# Altium PCB LED_Dimmer_MOSFET_SSR_v1.1.PcbDoc
Units mm, origin at the board's own origin, x right, y up, seen from the top; angles counter-clockwise.
Board outline 139.61 x 63.66 mm, 2 copper layers (Top Layer, Bottom Layer); 57 components, 61 nets, 371 pads, 48 vias.
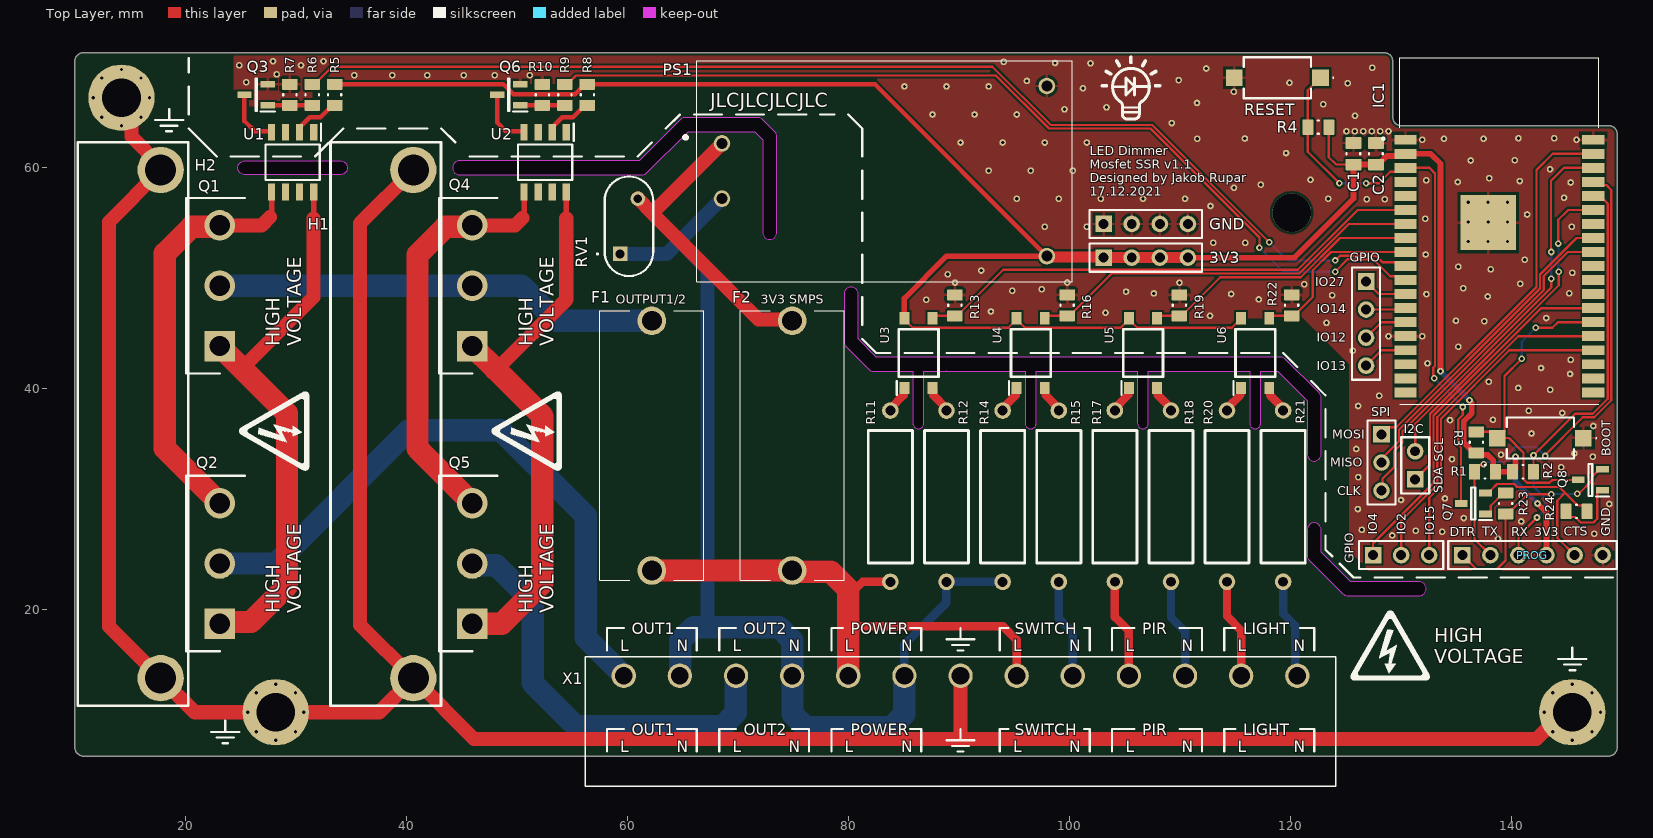
[diagram p0: Top Layer view]
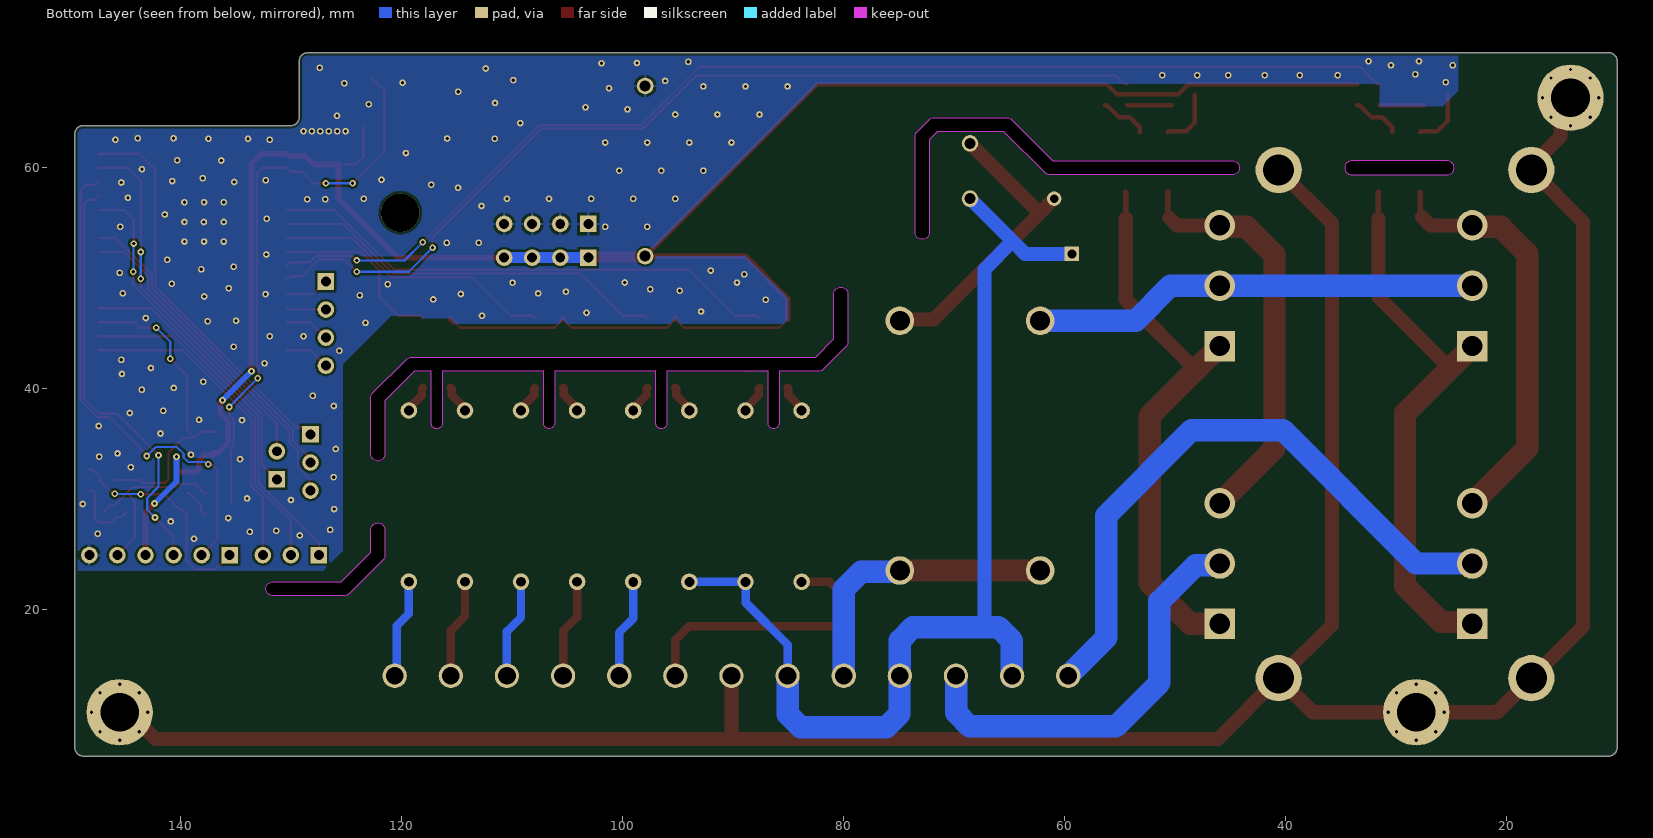
[diagram p1: Bottom Layer view, seen from below]
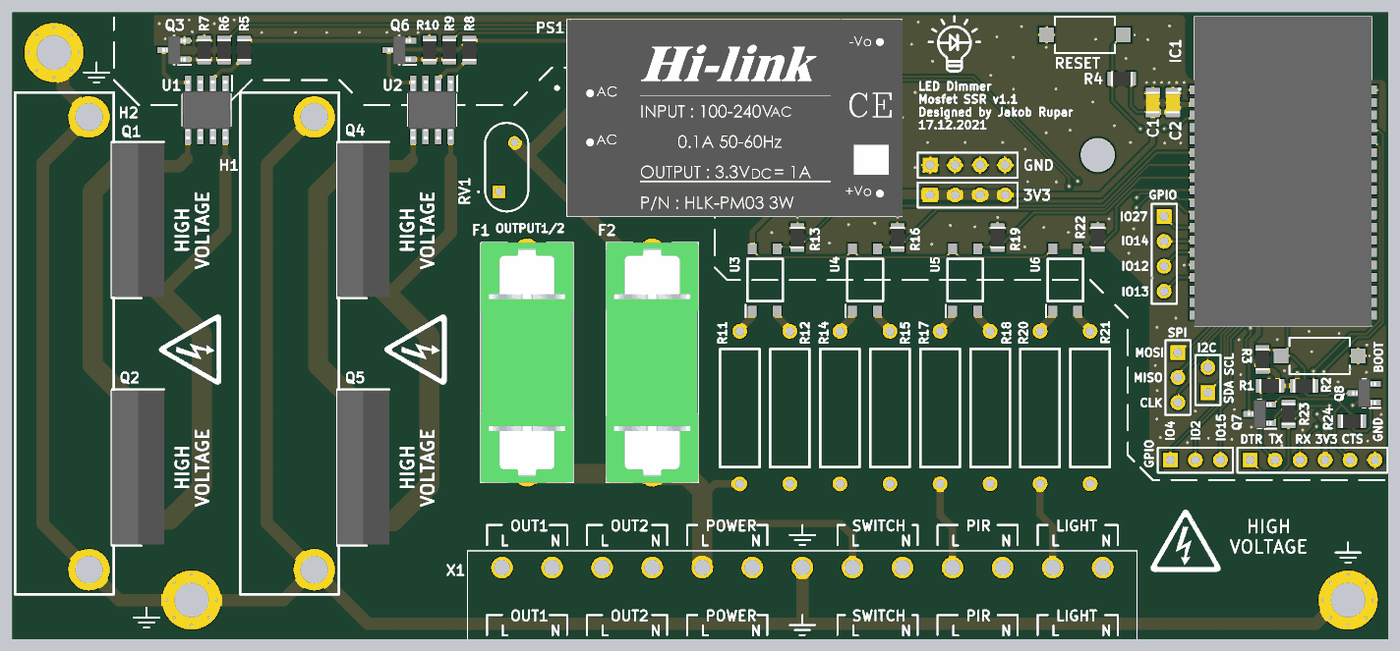
[diagram p2: 3D render of the assembled board from above, using the file's embedded part models]

## Layer stack, top to bottom
Top Solder: solder mask 0.0102, Solder Resist, Dk 3.5
Top Layer: signal copper 0.0356
Dielectric 1: dielectric 0.32, FR-4, Dk 4.8
Bottom Layer: signal copper 0.0356
Bottom Solder: solder mask 0.0102, Solder Resist, Dk 3.5

## Board outline
10,7.493 ccw(c10.811,7.51) 10.828,6.698 148.811,6.698 ccw(c148.811,7.493) 149.606,7.493 149.606,62.992 ccw(c148.844,62.992) 148.844,63.754 130.048,63.754 cw(c130.048,64.516) 129.286,64.516 129.286,69.596 ccw(c128.524,69.596) 128.524,70.358 10.795,70.358 ccw(c10.778,69.579) 10,69.596
cut-out: 44.831,59.309 61.341,59.309 ccw(c61.341,59.944) 61.79,59.495 65.513,63.218 71.555,63.218 72.266,62.506 72.266,54.098 ccw(c72.902,54.098) 73.537,54.098 73.537,62.769 ccw(c72.902,62.769) 73.351,63.219 72.267,64.302 ccw(c71.818,63.853) 71.818,64.488 65.25,64.488 ccw(c65.25,63.853) 64.801,64.302 61.078,60.579 44.831,60.579 ccw(c44.831,59.944)
cut-out: 82.296,41.529 85.86,41.529 85.86,36.83 ccw(c86.36,36.83) 86.86,36.83 86.86,41.529 88.9,41.529 cw(c88.899,41.935) 88.898,41.529 88.9,41.529 96.02,41.529 96.02,36.83 ccw(c96.52,36.83) 97.02,36.83 97.02,41.529 106.18,41.529 106.18,36.83 ccw(c106.68,36.83) 107.18,36.83 107.18,41.529 116.34,41.529 116.34,36.83 ccw(c116.84,36.83) 117.34,36.83 117.34,41.529 118.863,41.529 121.539,38.853 121.539,34.036 ccw(c122.174,34.036) 122.809,34.036 122.809,39.116 ccw(c122.174,39.116) 122.623,39.565 119.575,42.613 ccw(c119.126,42.164) 119.126,42.799 88.902,42.799 ccw(c88.9,42.163) 88.9,42.799 82.559,42.799 80.899,44.459 80.899,48.514 ccw(c80.264,48.514) 79.629,48.514 79.629,44.196 ccw(c80.264,44.196) 79.815,43.747 81.847,41.715 ccw(c82.296,42.164)
cut-out: 121.539,24.892 ccw(c122.174,24.892) 121.725,24.443 124.773,21.395 ccw(c125.222,21.844) 125.222,21.209 131.674,21.209 ccw(c131.674,21.844) 132.309,21.844 ccw(c131.674,21.844) 131.674,22.479 125.485,22.479 122.809,25.155 122.809,27.178 ccw(c122.174,27.178) 121.539,27.178
cut-out: 25.4,59.309 cw(c25.4,59.944) 25.4,60.579 34.036,60.579 cw(c34.036,59.944) 34.671,59.944 cw(c34.036,59.944) 34.036,59.309

## Design rules (kind name [scope] priority, off if disabled: settings)
BoardOutlineClearance [All] p1: gap=0.254 ignorepadtopadclearanceinfootprint=FALSE
Clearance [All] p1: gap=0.203 ignorepadtopadclearanceinfootprint=FALSE except(0: Arc-Hole Track-Hole SMDPad-Hole THPad-Hole Via-Hole Fill-Hole Poly-Hole Region-Hole Text-Hole; 0.127: Arc-Arc Arc-Track Track-Track; 0.254: Arc-THPad Arc-Via Arc-Text Track-THPad Track-Via Track-Text SMDPad-SMDPad SMDPad-THPad SMDPad-Via SMDPad-Text THPad-THPad THPad-Via THPad-Text Via-Via Via-Text Fill-Text Poly-Text Region-Text Text-Text)
MinimumSolderMaskSliver [All] p1: minsoldermaskwidth=0.203
PolygonConnect [All] p1: connectstyle=Relief reliefconductorwidth=0.254 reliefentries=4 polygonreliefangle="90 Angle" airgapwidth=0.254
RoutingVias [All] p1: holewidth=0.3 width=0.6 viastyle="Through Hole" minholewidth=0.3 minwidth=0.6 maxholewidth=3 maxwidth=5
SolderMaskExpansion [All] p1: expansion=0.102 istentingtop=FALSE
Width [All] p1: maxlimit=5.08 minlimit=0.127 preferedwidth=0.254
29 further rules are at their usual default settings.

## Classes and differential pairs
component class Mosfet_SSR: F1 H1 H2 Q1 Q2 Q3 Q4 Q5 Q6 R5 R6 R7 R8 R9 R10 U1 U2
component class ESP32_main: 3V3 BOOT C1 C2 GND GPIO I2C IC1 PROG Q7 Q8 R1 R2 R3 R4 R23 R24 RESET SPI
component class 230V_Inputs: F2 PS1 R11 R12 R13 R14 R15 R16 R17 R18 R19 R20 R21 R22 RV1 U3 U4 U5 U6 X1

## Components (designator, comment, footprint, x,y, rotation, side; value= is the part's Value field where it differs from the comment)
3V3 "3V3" HDR1X4 103.124,51.816 r0 top (schematic designator P4)
BOOT "1TS002E-2500-2500-CT" 1TS002E25002500CT 142.646,35.484 r180 top (schematic designator S1)
C1 "10 uF" C2012_0805I_N 125.73,61.214 r90 top
C2 "0.1 uF" C2012_0805I_N 127.762,61.214 r90 top
F1 "0PTF0078P" FH1-200CK-B 62.23,34.798 r90 top
F2 "0PTF0078P" FH1-200CK-B 74.93,34.798 r90 top
GND "GND" HDR1X4 103.124,54.864 r0 top (schematic designator P6)
GPIO "GPIO" HDR1X3 127.508,24.892 r0 top (schematic designator P7)
GPIO "GPIO" HDR1X4 126.873,49.657 r270 top (schematic designator P3)
H1 "C247-050-2VE" C247-050-2VE 40.64,13.75 r90 top
H2 "C247-050-2VE" C247-050-2VE 17.78,13.75 r90 top
I2C "I2C" HDR1X2 131.318,31.75 r90 top (schematic designator P5)
IC1 "ESP32-WROVER-IB__16MB_" ESP32WROVERIB16MB 138.938,51.054 r0 top
PROG "PROG" HDR1X6 135.585,24.892 r0 top (schematic designator P1)
PS1 "HLK-PM03" HLKPM03 68.58,62.15 r0 top
Q1 "IRFP460PBF" TO546P531X1558X2511-3P 23.114,43.816 r90 top
Q2 "IRFP460PBF" TO546P531X1558X2511-3P 23.114,18.67 r90 top
Q3 "SI2302CDS-T1-E3" SOT95P237X112-3N 26.416,66.548 r180 top
Q4 "IRFP460PBF" TO546P531X1558X2511-3P 45.974,43.816 r90 top
Q5 "IRFP460PBF" TO546P531X1558X2511-3P 45.974,18.67 r90 top
Q6 "SI2302CDS-T1-E3" SOT95P237X112-3N 49.276,66.548 r180 top
Q7 "S8050" SOT95P240X110-3N 136.576,29.566 r180 top
Q8 "S8050" SOT95P240X110-3N 147.168,31.699 r180 top
R1 "10k" R2012_0805I_N 137.632,32.436 r0 top
R2 "10k" R2012_0805I_N 141.072,32.436 r180 top
R3 "10k" R2012_0805I_N 136.855,35.103 r270 top
R4 "10k" R2012_0805I_N 122.555,63.627 r0 top
R5 "36" R2012_0805I_N 33.528,66.548 r90 top
R6 "100" R2012_0805I_N 31.496,66.548 r90 top
R7 "100k" R2012_0805I_N 29.464,66.548 r270 top
R8 "36" R2012_0805I_N 56.388,66.548 r90 top
R9 "100" R2012_0805I_N 54.356,66.548 r90 top
R10 "100k" R2012_0805I_N 52.324,66.548 r270 top
R11 "47k 2W" MFR02SF4702A10 83.82,22.473 r90 top
R12 "47k 2W" MFR02SF4702A10 88.9,22.473 r90 top
R13 "10k" R2012_0805I_N 89.662,47.498 r270 top
R14 "47k 2W" MFR02SF4702A10 93.98,22.473 r90 top
R15 "47k 2W" MFR02SF4702A10 99.06,22.473 r90 top
R16 "10k" R2012_0805I_N 99.822,47.498 r270 top
R17 "47k 2W" MFR02SF4702A10 104.14,22.479 r90 top
R18 "47k 2W" MFR02SF4702A10 109.22,22.479 r90 top
R19 "10k" R2012_0805I_N 109.982,47.498 r270 top
R20 "47k 2W" MFR02SF4702A10 114.283,22.479 r90 top
R21 "47k 2W" MFR02SF4702A10 119.363,22.479 r90 top
R22 "10k" R2012_0805I_N 120.142,47.498 r270 top
R23 "10k" R2012_0805I_N 139.497,29.566 r90 top
R24 "10k" R2012_0805I_N 145.923,28.854 r180 top
RESET "1TS002E-2500-2500-CT" 1TS002E25002500CT 118.847,68.097 r180 top (schematic designator S2)
RV1 "B72207S0271K101" B72207S0271K101 59.36,52.15 r90 top
SPI "SPI" HDR1X3 128.27,35.814 r270 top (schematic designator P2)
U1 "Si8752AB-IS" SOIC127P600X175-8N 29.718,60.452 r270 top
U2 "Si8752AB-IS" SOIC127P600X175-8N 52.578,60.452 r270 top
U3 "CT354A" CT354A 87.63,43.18 r90 top
U4 "CT354A" CT354A 97.79,43.18 r90 top
U5 "CT354A" CT354A 107.95,43.18 r90 top
U6 "CT354A" CT354A 118.11,43.18 r90 top
X1 "WJ2EDGRC-5.08-13P" WJ2EDGRC-5.08-13P_SLIM 59.69,13.97 r0 top (schematic designator X?)

## Footprints (in the part's own frame and the unit in brackets; to place one, negate y for a bottom-side part, rotate by r counter-clockwise, add the part's x,y. Pads: shape width x height; smd on the part's side, far side on the other; paste and mask are expansions set on the pad)
1TS002E25002500CT [mm]
  rect 1.5x1.5 smd: 1(-3.9,0) 2(3.9,0)
  silkscreen extent -5.1,-1.85 3.05,1.85
B72207S0271K101 [mm]
  rect 1.3x1.3 hole 0.8: 1(0,0)
  round 1.3 hole 0.8: 2(5,-1.6)
  silkscreen extent -2,-3 7,2.1
C247-050-2VE [mm] "Heatsink"
  round 4.2 hole 2.8: 1(0,0) 2(46,0)
  silkscreen extent -2.5,-2.5 48.5,7.5
C2012_0805I_N [mm] "Chip Capacitor, 2-Leads, Body 2.05x1.25mm, IPC Medium Density"
  rrect15% 1.05x1.45 smd: 1(-0.975,0) 2(0.975,0)
  silkscreen extent -0.05,-0.63 0.05,0.63, body extent -1.1,-0.7 1.1,0.7, height 1.4
CT354A [mm]
  rect 1.1x0.9 smd: 1(-3.15,2.54) 2(-3.15,0) 3(3.15,0) 4(3.15,2.54)
  silkscreen extent -3.78,-0.55 2.15,3.22
ESP32WROVERIB16MB [mm]
  rect 2x0.9 smd: 1(-8.5,11.43) 2(-8.5,10.16) 3(-8.5,8.89) 4(-8.5,7.62) 5(-8.5,6.35) 6(-8.5,5.08) 7(-8.5,3.81) 8(-8.5,2.54) 9(-8.5,1.27) 10(-8.5,0) 11(-8.5,-1.27) 12(-8.5,-2.54) 13(-8.5,-3.81) 14(-8.5,-5.08) 15(-8.5,-6.35) 16(-8.5,-7.62) 17(-8.5,-8.89) 18(-8.5,-10.16) 19(-8.5,-11.43) 20(8.5,-11.43) 21(8.5,-10.16) 22(8.5,-8.89) 23(8.5,-7.62) 24(8.5,-6.35) 25(8.5,-5.08) 26(8.5,-3.81) 27(8.5,-2.54) 28(8.5,-1.27) 29(8.5,0) 30(8.5,1.27) 31(8.5,2.54) 32(8.5,3.81) 33(8.5,5.08) 34(8.5,6.35) 35(8.5,7.62) 36(8.5,8.89) 37(8.5,10.16) 38(8.5,11.43)
  rect 5x5 smd: 39(-1,3.93)
  silkscreen extent -10.6,-12.53 9,18.87, body extent -9,-12.53 9,18.87, height 3.5
FH1-200CK-B [mm]
  round 2.6 hole 1.8: 1(-11.3,0) 2(11.3,0)
  silkscreen extent -12.2,-4.7 12.2,4.7, body extent -12.2,-4.7 12.2,4.7, height 11.45
HDR1X2 [mm] "Connector; Header; 2 Position"
  rect 1.5x1.5 hole 0.9: 1(0,0)
  round 1.5 hole 0.9: 2(2.54,0)
  silkscreen extent -1.27,-1.27 3.81,1.27
HDR1X3 [mm] "Connector; Header; 3 Position"
  rect 1.5x1.5 hole 0.9: 1(0,0)
  round 1.5 hole 0.9: 2(2.54,0) 3(5.08,0)
  silkscreen extent -1.27,-1.27 6.35,1.27
HDR1X4 [mm] "Connector; Header; 4 Position"
  rect 1.5x1.5 hole 0.9: 1(0,0)
  round 1.5 hole 0.9: 2(2.54,0) 3(5.08,0) 4(7.62,0)
  silkscreen extent -1.27,-1.27 8.89,1.27
HDR1X6 [mm] "Connector; Header; 6 Position"
  rect 1.5x1.5 hole 0.9: 1(0,0)
  round 1.5 hole 0.9: 2(2.54,0) 3(5.08,0) 4(7.62,0) 5(10.16,0) 6(12.7,0)
  silkscreen extent -1.27,-1.27 13.97,1.27
HLKPM03 [mm]
  round 1.5 hole 1: 1(0,0) 2(0,-5) 3(29.4,5.2) 4(29.4,-10.2)
  silkscreen extent -3.35,-12.5 31.7,7.5, body extent -2.25,-12.49 31.75,7.51, height 15.28
MFR02SF4702A10 [mm]
  round 1.5 hole 0.9: 1(0,0) 2(15.5,0)
  silkscreen extent 1.7,-2 13.7,2
R2012_0805I_N [mm] "Chip Resistor, 2-Leads, Body 2.05x1.25mm, IPC Medium Density"
  rrect15% 1x1.4 smd: 1(-0.95,0) 2(0.95,0)
  silkscreen extent -0.05,-0.6 0.05,0.6, body extent -1.1,-0.7 1.1,0.7, height 0.8
SOIC127P600X175-8N [mm]
  rect 1.525x0.65 smd: 1(-2.712,1.905) 2(-2.712,0.635) 3(-2.712,-0.635) 4(-2.712,-1.905) 5(2.712,-1.905) 6(2.712,-0.635) 7(2.712,0.635) 8(2.712,1.905)
  silkscreen extent -3.47,-2.45 1.6,2.58, body extent -3,-2.45 3,2.45, height 1.75
SOT95P237X112-3N [mm]
  rect 1.3x0.6 smd: 1(-1.05,0.95) 2(-1.05,-0.95) 3(1.05,0)
  silkscreen extent -1.7,-1.46 0.05,1.5, body extent -1.18,-1.46 1.18,1.46, height 1.12
SOT95P240X110-3N [mm]
  rect 1.15x0.6 smd: 1(-1.1,0.95) 2(-1.1,-0.95) 3(1.1,0)
  silkscreen extent -1.68,-1.45 0.18,1.5, body extent -1.2,-1.45 1.2,1.45, height 1.1
TO546P531X1558X2511-3P [mm]
  rect 2.76x2.76 hole 1.84: 1(0,0)
  round 2.76 hole 1.84: 2(5.46,0) 3(10.92,0)
  silkscreen extent -2.47,-2.29 13.39,3.02, body extent -2.33,-2.29 13.25,3.02, height 24.27
WJ2EDGRC-5.08-13P_SLIM [mm]
  round 2.2 hole 1.6: 1(0,0) 2(5.08,0) 3(10.16,0) 4(15.24,0) 5(20.32,0) 6(25.4,0) 7(30.48,0) 8(35.56,0) 9(40.64,0) 10(45.72,0) 11(50.8,0) 12(55.88,0) 13(60.96,0)
  silkscreen extent -3.5,-10 64.44,1.7

## Part data
3V3 GND GPIO: library part "Header 4", "Header, 4-Pin", LatestRevisionDate=17-Jul-2002, LatestRevisionNote="Re-released for DXP Platform.", Publisher="Altium Limited"
BOOT RESET: "Switch", Manufacturer_Name="HON YUAN", Datasheet Link=https://datasheet.lcsc.com/szlcsc/HYP-1TS002E-2500-2500_C329185.pdf, Height=2.7mm, Manufacturer_Part_Number=1TS002E-2500-2500-CT
C1 C2: library part C, "Capacitor"
F1 F2: "Fuse holder", Manufacturer_Name=LITTELFUSE, Mouser Part Number=576-0PTF0078P, Arrow Part Number=0PTF0078P, Arrow Price/Stock=https://www.arrow.com/en/products/0ptf0078p/littelfuse?region=nac, Datasheet Link=https://media.digikey.com/pdf/Data%20Sheets/Littelfuse%20PDFs/PTF075_77_78.pdf, Height=11.5mm, Manufacturer_Part_Number=0PTF0078P, Mouser Price/Stock=https://www.mouser.co.uk/ProductDetail/Littelfuse/0PTF0078P?qs=Co4VkB5J4%2Fsczy6gG8s%2FsA%3D%3D
GPIO SPI: library part "Header 3", "Header, 3-Pin", LatestRevisionDate=17-Jul-2002, LatestRevisionNote="Re-released for DXP Platform.", Publisher="Altium Limited"
H1 H2: "Heatsink"
I2C: library part "Header 2", "Header, 2-Pin", LatestRevisionDate=17-Jul-2002, LatestRevisionNote="Re-released for DXP Platform.", Publisher="Altium Limited"
IC1: "Integrated Circuit", Manufacturer_Name="Espressif Systems", Manufacturer_Part_Number="ESP32-WROVER-IB (16MB)", Mouser Part Number=356-ESP32WROIB(16MB), Datasheet Link="https://componentsearchengine.com/Datasheets/1/ESP32-WROVER-IB (16MB).pdf", Height=3.4mm, Mouser Price/Stock=https://www.mouser.co.uk/ProductDetail/Espressif-Systems/ESP32-WROVER-IB-16MB?qs=w%2Fv1CP2dgqoY4iJbr7cDFQ%3D%3D
PROG: library part "Header 6", "Header, 6-Pin", LatestRevisionDate=17-Jul-2002, LatestRevisionNote="Re-released for DXP Platform.", Publisher="Altium Limited"
PS1: "Power Supply", Manufacturer_Name=Hi-Link, Datasheet Link=https://datasheet.lcsc.com/szlcsc/1906201102_HI-LINK-HLK-PM03_C209904.pdf, Height=15mm, Manufacturer_Part_Number=HLK-PM03
Q1 Q2 Q4 Q5: "MOSFET (N-Channel)", Manufacturer_Name=Vishay, Mouser Part Number=844-IRFP460PBF, Arrow Part Number=IRFP460PBF, Arrow Price/Stock=https://www.arrow.com/en/products/irfp460pbf/vishay?region=nac, Datasheet Link=http://www.vishay.com/docs/91237/91237.pdf, Height=5.31mm, Manufacturer_Part_Number=IRFP460PBF, Mouser Price/Stock=https://www.mouser.co.uk/ProductDetail/Vishay-Semiconductors/IRFP460PBF?qs=%2FRKvNCQzLu1lHqVRTT%2Fu6Q%3D%3D
Q3 Q6: "MOSFET (N-Channel)", Manufacturer_Name=Vishay, Mouser Part Number=781-SI2302CDS-E3, Arrow Part Number=SI2302CDS-T1-E3, Arrow Price/Stock=https://www.arrow.com/en/products/si2302cds-t1-e3/vishay, Datasheet Link=https://labcenter.componentsearchengine.com/Datasheets/2/SI2302CDS-T1-E3.pdf, Height=1.12mm, Manufacturer_Part_Number=SI2302CDS-T1-E3, Mouser Price/Stock=https://www.mouser.co.uk/ProductDetail/Vishay-Semiconductors/SI2302CDS-T1-E3?qs=%252BPu8jn5UVnHNrjAmGCs%2Fuw%3D%3D
Q7 Q8: "Transistor BJT NPN", Manufacturer_Name=Galaxy, Manufacturer_Part_Number=S8050G, Height=1.1mm
R1 R2 R3 R4 R5 R6 R7 R8 R9 R10 R13 R16 R19 R22 R23 R24: library part R, "R"
R11 R12 R14 R15 R17 R18 R20 R21: library part "47k 2W resistor", "MFR02SF4702A10"
RV1: "Varistor", Manufacturer_Name=TDK, Mouser Part Number=871-B72207S271K101, Arrow Part Number=B72207S0271K101, Arrow Price/Stock=https://www.arrow.com/en/products/b72207s0271k101/epcos-tdk, Datasheet Link=https://product.tdk.com/system/files/dam/doc/product/protection/voltage/lead-disk-varistor/data_sheet/70/db/var/siov_leaded_standard.pdf, Height=11mm, Manufacturer_Part_Number=B72207S0271K101, Mouser Price/Stock=https://www.mouser.co.uk/ProductDetail/EPCOS-TDK/B72207S0271K101?qs=dEfas%2FXlABKLl07P%2FsKndA%3D%3D
U1 U2: "Integrated Circuit", Arrow Part Number=SI8752AB-IS, Manufacturer_Name="Silicon Labs", Mouser Part Number=634-SI8752AB-IS, Arrow Price/Stock=https://www.arrow.com/en/products/si8752ab-is/silicon-labs, Datasheet Link=https://datasheet.datasheetarchive.com/originals/distributors/DKDS-19/378558.pdf, Height=1.75mm, Manufacturer_Part_Number=Si8752AB-IS, Mouser Price/Stock=https://www.mouser.co.uk/ProductDetail/Silicon-Labs/SI8752AB-IS?qs=j6MGy4L9yX1nnSxizYyoBA%3D%3D
X1: "13P 5.08 mm female socket connector"

## Free pads (board coordinates)
  round 6 hole 3.5: 3(14.224,66.294) 3(28.194,10.668) 3(145.542,10.668)
  round 3.5 hole 3.5 unplated mask+0.102: 3(120.142,55.88)
  round 0.6 hole 0.3 mask+0.102: 5(147.447,36.576) 6(145.923,62.484) 7(128.905,44.704) 8(131.953,44.704) 9(128.905,63.246) 10(131.953,62.484) 10(136.123,53.268) 10(136.123,55.046) 10(136.123,56.824) 10(137.901,53.268) 10(137.901,56.824) 10(137.917,55.039) 10(139.679,53.268) 10(139.679,55.046) 10(139.679,56.824) 11(128.143,63.246) 12(127.381,63.246) 13(126.619,63.246) 14(125.095,63.246) 14(125.857,63.246) 15(114.91,66.827) 16(121.285,49.403) 17(109.981,49.55) 18(99.825,49.564) 19(89.668,49.557) 20(51.181,68.326) 21(28.272,68.401) 22(25.527,67.691) 23(24.892,69.215) 24(27.94,69.596) 25(30.48,69.215) 26(32.512,69.596) 27(35.306,68.326) 28(38.735,68.326) 29(41.91,68.326) 30(45.212,68.326) 31(48.006,68.326) 33(85.09,67.31) 34(88.9,67.31) 35(92.71,67.31) 36(87.63,64.77) 37(91.44,64.77) 38(95.25,64.77) 39(90.17,62.23) 40(93.98,62.23) 41(97.79,62.23) 42(92.71,59.69) 43(96.52,59.69) 44(100.33,59.69) 45(95.25,57.15) 46(99.06,57.15) 47(102.87,57.15) 48(97.79,54.61) 49(101.6,54.61) 50(106.68,57.15) 51(110.49,57.15) 52(101.6,62.23) 53(94.071,69.534) 54(96.172,67.808) 55(98.727,69.432) 56(101.929,69.398) 57(103.382,65.413) 58(101.248,67.139) 59(99.578,65.231) 60(112.402,68.935) 61(109.911,67.881) 62(109.283,63.992) 63(111.572,65.815) 64(111.592,62.574) 65(115.906,62.594) 66(119.634,61.278) 67(114.914,58.138) 68(117.348,58.42) 69(123.444,57.15) 70(121.842,58.867) 71(127.432,68.995) 72(125.204,67.598) 73(125.873,64.66) 74(122.996,65.694) 75(119.937,67.638) 76(133.922,62.572) 77(137.506,62.572) 78(140.66,62.613) 79(143.896,62.613) 80(140.333,60.627) 81(136.339,60.606) 82(140.783,58.742) 83(138.018,59.009) 84(135.172,58.661) 85(141.447,55.717) 86(141.241,51.628) 87(135.228,50.992) 88(138.148,50.752) 89(140.829,49.446) 90(135.228,43.742) 91(135.004,46.096) 92(137.581,46.061) 93(135.674,49.051) 94(137.891,48.295) 95(132.316,58.809) 96(132.232,55.329) 97(132.26,52.1) 98(132.334,48.514) 99(132.427,42.245) 100(143.526,59.811) 101(145.384,58.613) 102(144.794,57.24) 103(145.489,54.617) 104(145.544,50.436) 105(145.266,48.577) 106(143.174,46.346) 107(145.387,42.563) 108(142.713,41.826) 109(145.336,41.287) 110(140.652,40.022) 111(143.533,39.858) 112(141.846,35.9) 113(144.634,37.75) 114(133.756,27) 114(134.01,30.023) 114(135.712,28.245) 114(138.811,26.365) 114(140.919,27.94) 114(141.589,37.961) 114(144.526,32.842) 114(147.396,33.807) 114(147.523,26.822) 114(148.895,29.515) 115(137.973,40.589) 116(138.354,37.135) 117(139.09,33.985) 118(145.729,34.093) 125(134.468,37.109) 126(134.645,33.579) 129(131.369,27.102) 130(129.235,26.67) 131(126.492,27.178) 132(126.13,29.057) 133(130.039,29.877) 134(125.979,34.499) 135(126.173,31.95) 136(126.152,38.386) 137(128.052,39.314) 138(115.938,53.148) 139(113.036,53.167) 140(112.789,56.487) 141(92.045,50.646) 142(89.006,50.297) 143(87.067,48.008) 144(92.919,46.943) 145(94.858,48.812) 146(97.514,48.952) 147(103.289,46.819) 148(105.152,48.735) 149(107.665,48.577) 150(112.745,46.555) 151(114.66,48.524) 152(117.156,48.032) 153(123.801,48.397) 154(123.292,45.91) 155(125.657,43.395) 156(126.927,57.1) 157(128.562,57.1)

## Via types
v1: diameter 0.6, hole 0.3, Top Layer to Bottom Layer, 24 vias
v2: diameter 0.6, hole 0.3, Top Layer to Bottom Layer, tented both sides, 24 vias

## Nets (pads, with @x,y where several pads share a name; then routed paths per layer and width w, separated by ;. In a path a pad name is that pad's centre, name@x,y a point inside that pad or via, vN(x,y) a via of type N, cw(c..) or ccw(c..) an arc to the next point about the centre after c; other vN are vias at no path point)
+3V3: 3V3.1 3V3.2 3V3.3 3V3.4 C1.1 C2.1 IC1.2 PROG.4 PS1.4 R1.2 R2.2 R3.2 R4.2 R5.2 R8.2 U3.4 U4.4 U5.4 U6.4 | length 219.8
  Top Layer w0.203: U3.4@85.09,46.23 85.845,45.475 94.495,45.475 95.25,46.23 96.005,45.475 104.655,45.475 105.41,46.23 106.165,45.475 114.705,45.475 115.112,45.882 115.222,45.882 115.274,45.934 115.274,46.034 U6.4@115.374,46.034 ; R4.2 123.505,60.899 124.165,60.239 C1.1
  Top Layer w0.406: R5.2 48.801,67.498 49.707,66.592 55.282,66.592 56.188,67.498 R8.2 82.432,67.498 PS1.4
  Top Layer w0.508: U3.4@85.09,46.23 85.09,48.133 88.907,51.95 PS1.4 ; U4.4@95.25,46.23 U4.4 ; U5.4@105.41,46.23 U5.4 ; 3V3.4 120.396,51.816 125.73,57.15 C1.1 C2.1 127.962,60.239 128.741,61.018 130.242,61.018 IC1.2 132.715,61.214 133.604,60.325 v2(133.604,41.529) ; U6.4@115.374,46.034 115.57,46.23 U6.4 ; v2(136.23,38.903) 136.23,38.878 136.437,38.671 136.437,37.707 135.698,36.968 135.698,35.066 135.712,35.052 135.756,35.052 136.706,34.102 136.906,34.102 137.04,33.968 137.888,33.968 138.393,33.464 138.393,32.626 R1.2 140.03,32.436 140.088,32.377 R2.2@140.096,32.385 ; R3.2 R3.2@137.055,34.153 ; R2.2 140.402,32.716 v2(140.402,33.782) ; v2(142.392,29.566) 143.205,28.753 PROG.4
  Top Layer w1.016: PS1.4 98.047,51.883 103.057,51.883 3V3.1 3V3.2 3V3.3 3V3.4
  Bottom Layer w0.508: v2(133.604,41.529) v2(136.23,38.903) ; v2(140.402,33.782) 140.402,31.556 v2(142.392,29.566)
  Bottom Layer w1.016: 3V3.1 3V3.2 3V3.3 3V3.4
CLK: IC1.30 SPI.3 | length 30.9
  Top Layer w0.203: SPI.3 128.348,30.812 128.348,31.789 129.41,32.851 129.41,34.287 130.175,35.052 130.175,36.109 142.951,48.885 142.951,50.155 145.12,52.324 IC1.30
CTS: PROG.5 Q7.2 R24.1 | length 17.2
  Top Layer w0.203: Q7.2 137.951,30.516 138.149,30.714 138.149,30.755 138.714,31.32 140.279,31.32 140.537,31.063 144.352,31.063 144.883,30.532 ; PROG.5 144.168,26.469 144.168,29.817 144.883,30.532 ; R24.1 146.873,28.979 146.475,29.378 146.037,29.378 144.883,30.532
DTR: PROG.1 Q8.2 R23.1 | length 19.6
  Top Layer w0.203: PROG.1 136.84,23.637 138.724,23.637 139.497,24.409 R23.1 139.895,29.014 140.114,29.014 141.503,30.404 v2(143.637,30.404) ; v2(145.999,30.455) 146.075,30.531 146.205,30.531 147.282,31.607 147.282,31.938 147.993,32.649 Q8.2
  Bottom Layer w0.203: v2(143.637,30.404) 143.662,30.429 145.974,30.429 v2(145.999,30.455)
EARTH: H1.1 H1.2 H2.1 H2.2 pad.3@14.224,66.294 pad.3@28.194,10.668 pad.3@145.542,10.668 X1.7 | length 247.2
  Top Layer w1.27: pad.3@14.224,66.294 15.129,65.389 15.129,62.763 17.78,60.112 H2.2 13.081,55.051 13.081,18.449 H2.1 20.862,10.668 28.194,10.668 37.558,10.668 H1.1 ; H1.2 35.814,54.924 35.814,18.576 H1.1 ; X1.7 90.17,8.306 90.221,8.255 ; pad.3@145.542,10.668 144.701,10.668 142.288,8.255 90.221,8.255 ; H1.1 46.135,8.255 90.221,8.255
  other v1: 28.194,8.128 145.542,8.128 26.416,8.89 29.972,8.89 143.764,8.89 147.32,8.89 25.654,10.668 30.734,10.668 143.002,10.668 148.082,10.668 26.416,12.446 29.972,12.446 143.764,12.446 147.32,12.446 28.194,13.208 145.542,13.208 14.224,63.754 12.446,64.516 16.002,64.516 11.684,66.294 16.764,66.294 12.446,68.072 16.002,68.072 14.224,68.834
GND: BOOT.1 C1.2 C2.2 GND.1 GND.2 GND.3 GND.4 IC1.1 IC1.15 IC1.38 IC1.39 pad.5 pad.6 pad.7 pad.8 pad.9 pad.10 pad.11 pad.12 pad.13 pad.14 pad.15 pad.16 pad.17 pad.18 pad.19 pad.20 pad.21 pad.22 pad.23 pad.24 pad.25 pad.26 pad.27 pad.28 pad.29 pad.30 pad.31 pad.33 pad.34 pad.35 pad.36 pad.37 pad.38 pad.39 pad.40 pad.41 pad.42 pad.43 pad.44 pad.45 pad.46 pad.47 pad.48 pad.49 pad.50 pad.51 pad.52 pad.53 pad.54 pad.55 pad.56 pad.57 pad.58 pad.59 pad.60 pad.61 pad.62 pad.63 pad.64 pad.65 pad.66 pad.67 pad.68 pad.69 pad.70 pad.71 pad.72 pad.73 pad.74 pad.75 pad.76 pad.77 pad.78 pad.79 pad.80 pad.81 pad.82 pad.83 pad.84 pad.85 pad.86 pad.87 pad.88 pad.89 pad.90 pad.91 pad.92 pad.93 pad.94 pad.95 pad.96 pad.97 pad.98 pad.99 pad.100 pad.101 pad.102 pad.103 pad.104 pad.105 pad.106 pad.107 pad.108 pad.109 pad.110 pad.111 pad.112 pad.113 pad.114 pad.115 pad.116 pad.117 pad.118 pad.125 pad.126 pad.129 pad.130 pad.131 pad.132 pad.133 pad.134 pad.135 pad.136 pad.137 pad.138 pad.139 pad.140 pad.141 pad.142 pad.143 pad.144 pad.145 pad.146 pad.147 pad.148 pad.149 pad.150 pad.151 pad.152 pad.153 pad.154 pad.155 pad.156 pad.157 PROG.6 PS1.3 Q3.2 Q6.2 R7.1 R10.1 R13.1 R16.1 R19.1 R22.1 RESET.2
IO0: BOOT.2 IC1.25 Q8.3 R3.1 | length 29.5
  Top Layer w0.203: R3.1 138.177,36.053 BOOT.2 ; v2(140.97,42.672) 139.395,41.097 139.395,36.132 BOOT.2 ; v2(142.24,45.466) 143.73,45.466 144.238,45.974 IC1.25 ; Q8.3 143.75,31.699 143.482,31.431 141.439,31.431 141.122,31.748 141.122,34.163 139.802,35.484 BOOT.2
  Bottom Layer w0.203: v2(140.97,42.672) 140.97,44.196 v2(142.24,45.466)
IO2: GPIO.2@130.048,24.892 IC1.24 | length 31
  Top Layer w0.203: GPIO.2@130.048,24.892 130.048,28.01 133.314,31.276 133.314,37.38 140.638,44.704 IC1.24
IO4: GPIO.1@127.508,24.892 IC1.26 | length 33.4
  Top Layer w0.203: GPIO.1@127.508,24.892 127.508,25.937 132.984,31.413 132.984,37.517 142.711,47.244 IC1.26
IO5: IC1.29
IO12: GPIO.3@126.873,44.577 IC1.14 | length 4.1
  Top Layer w0.203: GPIO.3@126.873,44.577 128.27,45.974 IC1.14
IO13: GPIO.4 IC1.16 | length 4.1
  Top Layer w0.203: GPIO.4 128.27,43.434 IC1.16
IO14: GPIO.2@126.873,47.117 IC1.13 | length 3.6
  Top Layer w0.203: GPIO.2@126.873,47.117 130.311,47.117 IC1.13
IO15: GPIO.3@132.588,24.892 IC1.23 | length 29.1
  Top Layer w0.203: GPIO.3@132.588,24.892 132.588,30.083 133.644,31.139 133.644,37.243 139.835,43.434 IC1.23
IO25: IC1.10 R6.2 | length 107.4
  Top Layer w0.203: R6.2 31.696,67.498 33.286,69.088 93.05,69.088 98.308,63.83 107.493,63.83 v2(118.11,53.213) ; v2(124.079,51.562) 124.511,51.994 127.762,51.994 128.353,51.402 130.09,51.402 IC1.10
  Bottom Layer w0.203: v2(118.11,53.213) 119.761,51.562 v2(124.079,51.562)
IO26: IC1.11 R9.2 | length 85.6
  Top Layer w0.203: R9.2 54.556,67.498 55.361,68.303 93.368,68.303 98.171,63.5 107.356,63.5 117.221,53.635 v2(117.221,52.705) ; v2(124.079,50.546) 125.197,51.664 127.533,51.664 129.065,50.132 130.09,50.132 IC1.11
  Bottom Layer w0.203: v2(117.221,52.705) 119.38,50.546 v2(124.079,50.546)
IO27: GPIO.1@126.873,49.657 IC1.12 | length 4
  Top Layer w0.203: GPIO.1@126.873,49.657 128.016,48.514 IC1.12
IO32: IC1.8 R19.2 U5.3 | length 25.5
  Top Layer w0.203: U5.3 108.168,46.548 R19.2 110.182,46.548 113.684,50.05 120.961,50.05 124.505,53.594 IC1.8
IO33: IC1.9 R22.2 U6.3 | length 16.2
  Top Layer w0.203: U6.3 118.328,46.548 R22.2 120.342,46.548 122.047,48.253 122.047,50.669 123.702,52.324 IC1.9
IO34: IC1.6 R13.2 U3.3 | length 46.9
  Top Layer w0.203: U3.3 87.848,46.548 R13.2 89.862,46.548 94.024,50.71 120.687,50.71 126.111,56.134 IC1.6
IO35: IC1.7 R16.2 U4.3 | length 36.2
  Top Layer w0.203: U4.3 98.008,46.548 R16.2 100.022,46.548 103.854,50.38 120.824,50.38 125.308,54.864 IC1.7
IO36: IC1.4
IO39: IC1.5
LIGHT_L: R20.1 X1.12 | length 9.2
  Top Layer w0.762: R20.1 114.283,19.372 115.57,18.085 X1.12
  Bottom Layer w0.762: R20.1 R20.1@114.424,22.338
LIGHT_N: R21.1 X1.13 | length 9
  Bottom Layer w0.762: R21.1 119.363,19.6 120.447,18.517 120.447,14.173 X1.13
MISO: IC1.31 SPI.2 | length 29.1
  Top Layer w0.203: SPI.2 128.27,33.614 129.845,35.189 129.845,36.246 142.621,49.022 142.621,50.292 145.923,53.594 IC1.31
MOSI: IC1.37 SPI.1 | length 35.9
  Top Layer w0.203: SPI.1 128.918,36.462 129.594,36.462 142.291,49.159 142.291,59.741 143.764,61.214 IC1.37
NetF2_2: F2.2 PS1.1 RV1.2 | length 27.5
  Top Layer w1.27: RV1.2 62.293,55.816 ; PS1.1 62.293,55.864 62.293,55.816 ; F2.2 74.81,46.218 71.892,46.218 62.293,55.816
NetQ1_1: Q1.1 Q2.1 U1.8 | length 50.4
  Top Layer w0.508: 31.623,55.372 U1.8
  Top Layer w1.27: 25.147,41.784 31.623,48.26 31.623,55.372
  Top Layer w2.032: Q2.1 23.283,18.839 25.951,18.839 29.21,22.098 29.21,37.72 25.147,41.784 Q1.1
NetQ1_3: Q1.3 Q2.3 U1.5 | length 37.8
  Top Layer w0.508: 27.686,55.499 27.813,55.626 U1.5
  Top Layer w1.27: Q1.3 26.923,54.736 27.686,55.499
  Top Layer w2.032: Q2.3 18.162,34.542 18.162,52.198 20.561,54.597 22.975,54.597 Q1.3
NetQ3_1: Q3.1 R6.1 R7.2 | length 4
  Top Layer w0.406: Q3.1 R7.2 R6.1
NetQ3_3: Q3.3 U1.4 | length 5.2
  Top Layer w0.406: Q3.3 25.366,66.458 25.36,66.451 25.36,64.175 26.289,63.246 27.731,63.246 U1.4
NetQ4_1: Q4.1 Q5.1 U2.8 | length 50.7
  Top Layer w0.508: 54.483,55.372 U2.8
  Top Layer w1.27: 48.07,41.72 48.197,41.72 54.483,48.006 54.483,55.372
  Top Layer w2.032: Q5.1 Q5.1 48.641,18.669 52.324,22.352 52.324,37.466 48.07,41.72 Q4.1
NetQ4_3: Q4.3 Q5.3 U2.5 | length 37.8
  Top Layer w0.508: 50.527,55.419 50.673,55.565 U2.5
  Top Layer w1.27: Q4.3 49.844,54.736 50.527,55.419
  Top Layer w2.032: Q5.3 41.021,34.543 41.021,52.07 43.548,54.597 45.835,54.597 Q4.3
NetQ6_1: Q6.1 R9.1 R10.2 | length 4
  Top Layer w0.406: Q6.1 R10.2 R9.1
NetQ6_3: Q6.3 U2.4 | length 5.3
  Top Layer w0.406: Q6.3 48.226,64.042 49.022,63.246 50.591,63.246 U2.4
NetQ7_1: Q7.1 R23.2 | length 2.9
  Top Layer w0.203: Q7.1 137.951,28.616 138.149,28.814 138.149,29.368 139.297,30.516 R23.2
NetQ8_1: Q8.1 R24.2 | length 6.4
  Top Layer w0.203: R24.2 144.973,28.729 145.371,28.331 145.809,28.331 146.291,27.85 147.455,27.85 147.794,28.188 147.794,30.551 147.993,30.749 Q8.1
NetR5_1: R5.1 U1.2 | length 4.4
  Top Layer w0.406: U1.2 30.353,63.602 31.264,64.512 32.242,64.512 33.328,65.598 R5.1
NetR8_1: R8.1 U2.2 | length 4.4
  Top Layer w0.406: U2.2 53.213,63.602 54.124,64.512 55.102,64.512 56.188,65.598 R8.1
NetR11_2: R11.2 U3.1 | length 2.6
  Top Layer w0.762: R11.2 83.82,38.173 85.021,39.374 85.021,39.961 U3.1
NetR12_2: R12.2 U3.2 | length 2.6
  Top Layer w0.762: U3.2 87.699,39.961 87.699,39.374 88.9,38.173 R12.2
NetR14_2: R14.2 U4.1 | length 2.6
  Top Layer w0.762: R14.2 93.98,38.173 95.181,39.374 95.181,39.961 U4.1
NetR15_2: R15.2 U4.2 | length 2.6
  Top Layer w0.762: U4.2 97.859,39.961 97.859,39.374 99.06,38.173 R15.2
NetR17_2: R17.2 U5.1 | length 2.6
  Top Layer w0.762: R17.2 104.14,38.179 105.341,39.38 105.341,39.961 U5.1
NetR18_2: R18.2 U5.2 | length 2.6
  Top Layer w0.762: U5.2 108.019,39.961 108.019,39.38 109.22,38.179 R18.2
NetR20_2: R20.2 U6.1 | length 2.6
  Top Layer w0.762: R20.2 114.283,38.179 115.501,39.397 115.501,39.961 U6.1
NetR21_2: R21.2 U6.2 | length 2.6
  Top Layer w0.762: U6.2 118.179,39.961 118.179,39.363 119.363,38.179 R21.2
OUT1_L: Q2.2 X1.1 | length 57.2
  Bottom Layer w2.032: Q2.2 28.194,24.13 40.259,36.195 48.514,36.195 56.261,28.448 56.261,17.399 X1.1@59.635,14.025
OUT2_L: Q5.2 X1.3 | length 38.1
  Bottom Layer w2.032: Q5.2 46.113,23.991 48.145,23.991 51.435,20.701 51.435,13.335 55.372,9.398 68.605,9.398 69.818,10.61 69.818,13.938 X1.3
PIR_L: R17.1 X1.10 | length 9.2
  Top Layer w0.762: R17.1 104.14,19.279 105.41,18.009 X1.10
  Bottom Layer w0.762: R17.1 R17.1@104.281,22.338
PIR_N: R18.1 X1.11 | length 9
  Bottom Layer w0.762: R18.1 109.22,19.253 110.49,17.983 X1.11
PWR_L: F1.1 F2.1 R11.1 X1.5 X1.8 | length 63
  Top Layer w0.762: 80.01,18.44 94.031,18.44 95.25,17.221 X1.8 ; 80.01,21.793 80.62,21.793 81.299,22.473 R11.1
  Top Layer w2.032: F1.1 F2.1 75.039,23.389 78.414,23.389 80.01,21.793 80.01,18.44 X1.5
  Bottom Layer w2.032: F2.1 75.039,23.389 78.414,23.389 80.01,21.793 X1.5
PWR_N: PS1.2 R12.1 R14.1 RV1.1 X1.2 X1.4 X1.6 | length 98.1
  Top Layer w0.762: R12.1@88.881,22.454 R12.1
  Bottom Layer w0.762: X1.6 85.09,16.789 88.881,20.58 R12.1@88.881,22.454 ; R12.1 R14.1
  Bottom Layer w1.27: RV1.1 63.58,52.15 64.732,53.302 ; 67.285,18.364 67.285,50.749 64.732,53.302 ; PS1.2 64.732,53.302
  Bottom Layer w2.032: X1.2@64.802,13.892 64.802,17.152 66.015,18.364 73.74,18.364 74.93,17.174 X1.4 74.962,13.938 74.962,10.512 76.152,9.322 83.9,9.322 85.058,10.48 85.058,13.938 X1.6
PWR_OUT: F1.2 Q1.2 Q4.2 | length 40.4
  Bottom Layer w2.032: Q1.2 Q4.2 50.419,49.276 53.597,46.098 F1.2
RST: IC1.3 Q7.3 R4.1 RESET.1 | length 52
  Top Layer w0.203: RESET.1 121.605,66.956 R4.1 121.605,61.402 v2(124.46,58.547) ; v2(126.873,58.547) 128.016,58.547 129.065,59.596 130.09,59.596 IC1.3 132.613,59.944 133.121,59.436 133.121,42.013 132.948,41.84 132.948,41.257 132.961,41.245 132.961,40.967 v2(133.037,40.891) ; Q7.3 135.476,34.606 135.215,34.866 135.215,37.168 135.629,37.582 v2(135.629,38.296)
  Bottom Layer w0.203: v2(124.46,58.547) v2(126.873,58.547) ; v2@133.037,40.89 v2@135.629,38.297
RX: IC1.34 PROG.3 R2.1 | length 40
  Top Layer w0.203: PROG.3 140.665,26.619 v2(142.342,28.296) ; R2.1@141.985,32.396 R2.1@141.996,32.385 ; R2.1 v2(142.022,33.919) 145.791,37.689 147.384,37.689 148.743,39.048 148.743,56.71 148.397,57.056 147.786,57.056 IC1.34
  Bottom Layer w0.203: v2(142.022,33.919) 142.022,31.092 143.048,30.066 143.048,29.002 v2(142.342,28.296)
SCL_3V3: I2C.2 IC1.36 | length 33.9
  Top Layer w0.203: I2C.2 131.318,36.785 143.637,49.104 v2(143.637,49.911) ; v2(143.637,52.324) 143.616,52.345 143.616,58.78 144.78,59.944 IC1.36
  Bottom Layer w0.203: v2(143.637,49.911) v2(143.637,52.324)
SDA_3V3: I2C.1 IC1.33 | length 32.4
  Top Layer w0.203: I2C.1 132.653,33.085 132.653,37.654 144.309,49.309 v2(144.309,50.527) ; v2(144.272,53.086) 144.272,55.245 145.161,56.134 IC1.33
  Bottom Layer w0.203: v2(144.272,53.086) 144.293,53.065 144.293,50.544 v2(144.309,50.527)
SW_N: R15.1 X1.9 | length 9
  Bottom Layer w0.762: R15.1 99.06,19.152 100.33,17.882 X1.9
TX: IC1.35 PROG.2 R1.1 | length 45.2
  Top Layer w0.203: v2(137.53,33.101) 137.459,33.03 137.081,33.03 136.682,32.632 R1.1 136.682,26.335 PROG.2 ; v2(143.078,33.858) 143.078,33.947 146.49,37.359 147.521,37.359 149.073,38.911 149.073,57.937 148.624,58.386 147.726,58.386 IC1.35
  Bottom Layer w0.203: v2(137.53,33.101) 137.618,33.101 137.847,33.33 139.362,33.33 139.746,33.714 139.746,34.054 140.363,34.671 142.265,34.671 v2(143.078,33.858)
pads on no net: IC1.17 IC1.18 IC1.19 IC1.20 IC1.21 IC1.22 IC1.27 IC1.28 IC1.32 U1.1 U1.3 U1.6 U1.7 U2.1 U2.3 U2.6 U2.7

## Polygon pours and split planes (outlines as drawn)
GND on Top Layer "GND_L01_P000" (solid, remove dead copper, pour order 0): 24.384,70.358 24.384,66.929 25.791,65.522 31.496,65.522 31.496,67.564 56.642,67.564 82.366,67.564 97.98,51.95 88.907,51.95 85.09,48.133 85.09,46.23 85.473,45.847 94.767,45.847 95.25,46.33 95.733,45.847 105.027,45.847 105.41,46.23 105.793,45.847 115.087,45.847 115.57,46.33 118.11,46.33 118.328,46.548 120.965,46.548 125.349,42.164 125.349,25.273 127.127,23.495 149.606,23.495 149.606,70.358 24.384,70.358 24.003,70.739
GND on Bottom Layer "GND_L02_P002" (solid, remove dead copper, pour order 2): 24.384,70.358 24.384,66.929 25.791,65.522 31.496,65.522 31.496,67.564 56.642,67.564 82.366,67.564 97.98,51.95 88.907,51.95 85.09,48.133 85.09,46.23 85.473,45.847 94.767,45.847 95.25,46.33 95.733,45.847 105.027,45.847 105.41,46.23 105.793,45.847 115.087,45.847 115.57,46.33 118.11,46.33 118.328,46.548 120.965,46.548 125.349,42.164 125.349,25.273 127.127,23.495 149.606,23.495 149.606,70.358 24.384,70.358 24.003,70.739

## Silkscreen, mask and mechanical layers (free items; w line width, h text height)
Top Overlay:
  drawing of 139 lines, arcs and shapes, not listed
  text "JLCJLCJLCJLC" at 67.524,65.405 h1.27
  text "LED Dimmer / Mosfet SSR v1.1 / Designed by Jakob Rupar / 17.12.2021" at 101.854,57.404 h0.81
  text "IO27" at 122.271,49.236 h0.81
  text "3V3 SMPS" at 72.08,47.651 h0.81
  text "OUTPUT1/2" at 58.949,47.635 h0.81
  text "IO14" at 122.393,46.776 h0.81
  text "IO12" at 122.409,44.208 h0.81
  text "HIGH / VOLTAGE" at 30.48,43.774 h1.27 r90
  text "HIGH / VOLTAGE" at 53.34,43.774 h1.27 r90
  text "IO13" at 122.423,41.604 h0.81
  text "MOSI" at 123.802,35.419 h0.81
  text "SCL" at 133.858,33.35 h0.81 r90
  text "MISO" at 123.641,32.875 h0.81
  text "SDA" at 133.833,30.505 h0.81 r90
  text "CLK" at 124.274,30.32 h0.81
  text "IO2" at 130.481,26.747 h0.81 r90
  text "IO4" at 127.891,26.73 h0.81 r90
  text "IO15" at 133.037,26.678 h0.81 r90
  text "TX" at 137.389,26.645 h0.81
  text "CTS" at 144.755,26.645 h0.81
  text "DTR" at 134.468,26.619 h0.81
  text "RX" at 140.03,26.619 h0.81
  text "3V3" at 142.088,26.619 h0.81
  text "GND" at 148.971,26.619 h0.81 r90
  text "HIGH / VOLTAGE" at 30.48,19.644 h1.27 r90
  text "HIGH / VOLTAGE" at 53.34,19.644 h1.27 r90
  text "OUT1" at 60.401,17.729 h1.02
  text "OUT2" at 70.561,17.729 h1.02
  text "POWER" at 80.213,17.729 h1.02
  text "SWITCH" at 95.072,17.729 h1.02
  text "PIR" at 106.629,17.729 h1.02
  text "LIGHT" at 115.773,17.729 h1.02
  text "L" at 59.385,16.205 h1.02
  text "N" at 64.465,16.205 h1.02
  text "L" at 69.545,16.205 h1.02
  text "N" at 74.625,16.205 h1.02
  text "L" at 79.705,16.205 h1.02
  text "N" at 84.785,16.205 h1.02
  text "L" at 94.945,16.205 h1.02
  text "N" at 100.025,16.205 h1.02
  text "L" at 105.105,16.205 h1.02
  text "N" at 110.185,16.205 h1.02
  text "L" at 115.265,16.205 h1.02
  text "N" at 120.345,16.205 h1.02
  text "HIGH / VOLTAGE" at 133.055,15.113 h1.27
  text "OUT1" at 60.401,8.585 h1.02
  text "OUT2" at 70.561,8.585 h1.02
  text "POWER" at 80.213,8.585 h1.02
  text "SWITCH" at 95.072,8.585 h1.02
  text "PIR" at 106.629,8.585 h1.02
  text "LIGHT" at 115.773,8.585 h1.02
  text "L" at 59.385,7.061 h1.02
  text "N" at 64.465,7.061 h1.02
  text "L" at 69.545,7.061 h1.02
  text "N" at 74.625,7.061 h1.02
  text "L" at 79.705,7.061 h1.02
  text "N" at 84.785,7.061 h1.02
  text "L" at 94.945,7.061 h1.02
  text "N" at 100.025,7.061 h1.02
  text "L" at 105.105,7.061 h1.02
  text "N" at 110.185,7.061 h1.02
  text "L" at 115.265,7.061 h1.02
  text "N" at 120.345,7.061 h1.02
Mechanical 1:
  lines w0.254: 10,7.493 ccw(c10.811,7.51) 10.828,6.698 100,6.698 148.811,6.698 ccw(c148.811,7.493) 149.606,7.493 149.606,62.992 ccw(c148.844,62.992) 148.844,63.754 130.048,63.754 cw(c130.048,64.516) 129.286,64.516 129.286,69.596 ccw(c128.524,69.596) 128.524,70.358 10.795,70.358 ccw(c10.778,69.579) 10,69.596 10,7.493
  lines w1: 86.36,36.83 86.36,42.164 ; 96.52,36.83 96.52,42.164 ; 106.68,36.83 106.68,42.164 ; 116.84,36.83 116.84,42.164
  lines w1.27: 25.4,59.944 34.036,59.944 ; 44.831,59.944 61.341,59.944 65.25,63.853 65.476,63.853 71.818,63.853 72.902,62.769 72.902,54.098 ; 80.264,48.514 80.264,44.196 82.296,42.164 88.9,42.164 119.126,42.164 122.174,39.116 122.174,34.036 ; 122.174,27.178 122.174,24.892 125.222,21.844 131.674,21.844